# Altium PCB LPF.PcbDoc
Units mm, origin at the board's own origin, x right, y up, seen from the top; angles counter-clockwise.
Board outline 168 x 90 mm, 2 copper layers (Top Layer, Bottom Layer), stack 1.571 mm thick; 152 components, 40 nets, 384 pads, 857 vias.
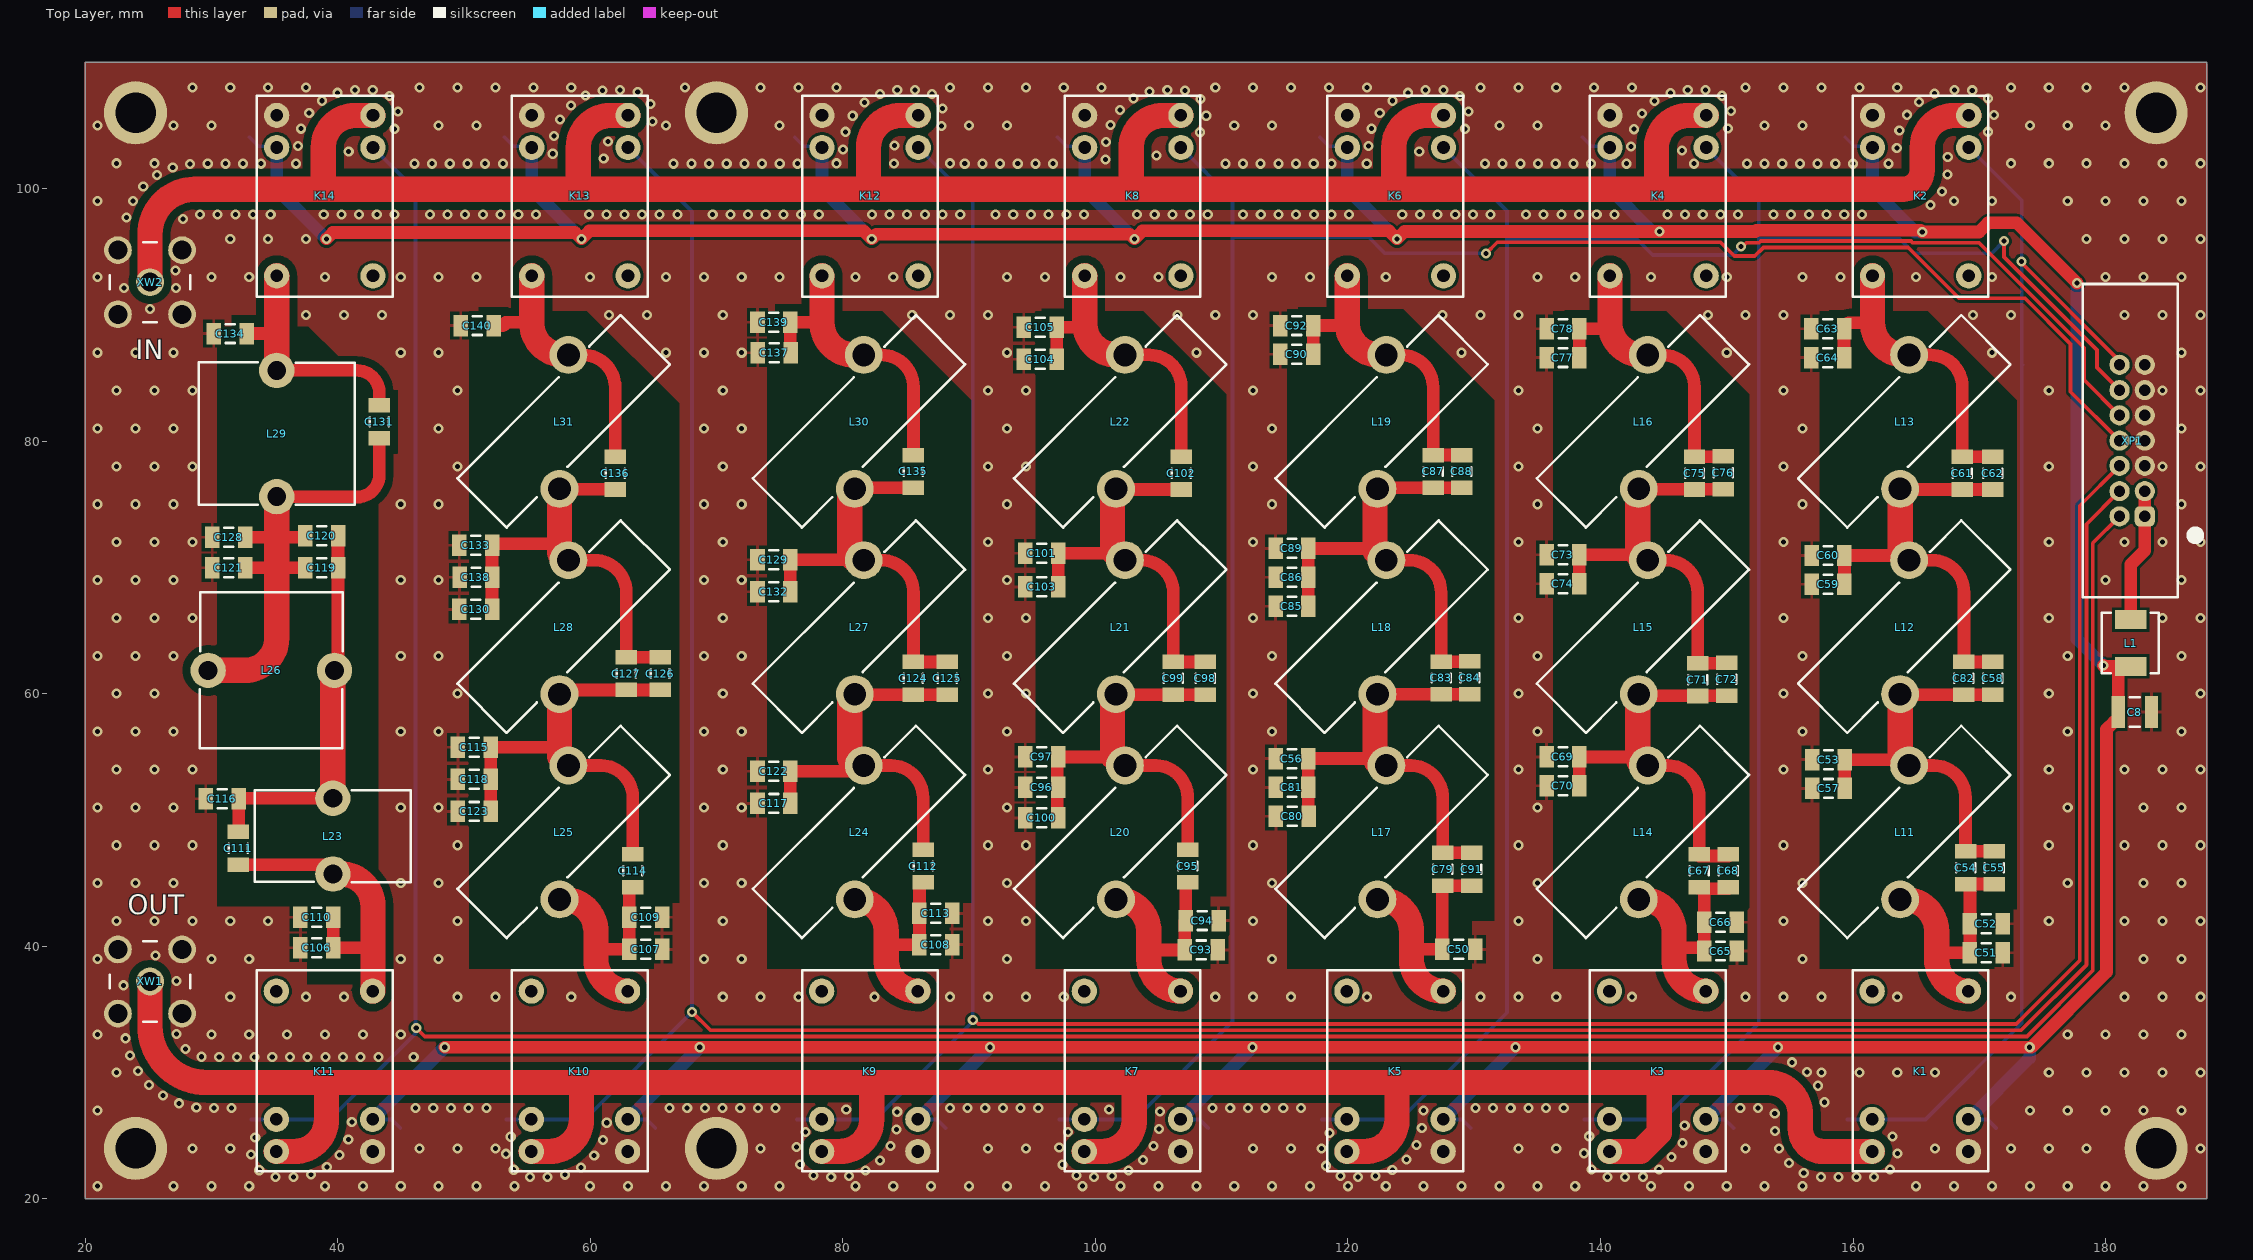
[diagram p0: Top Layer view]
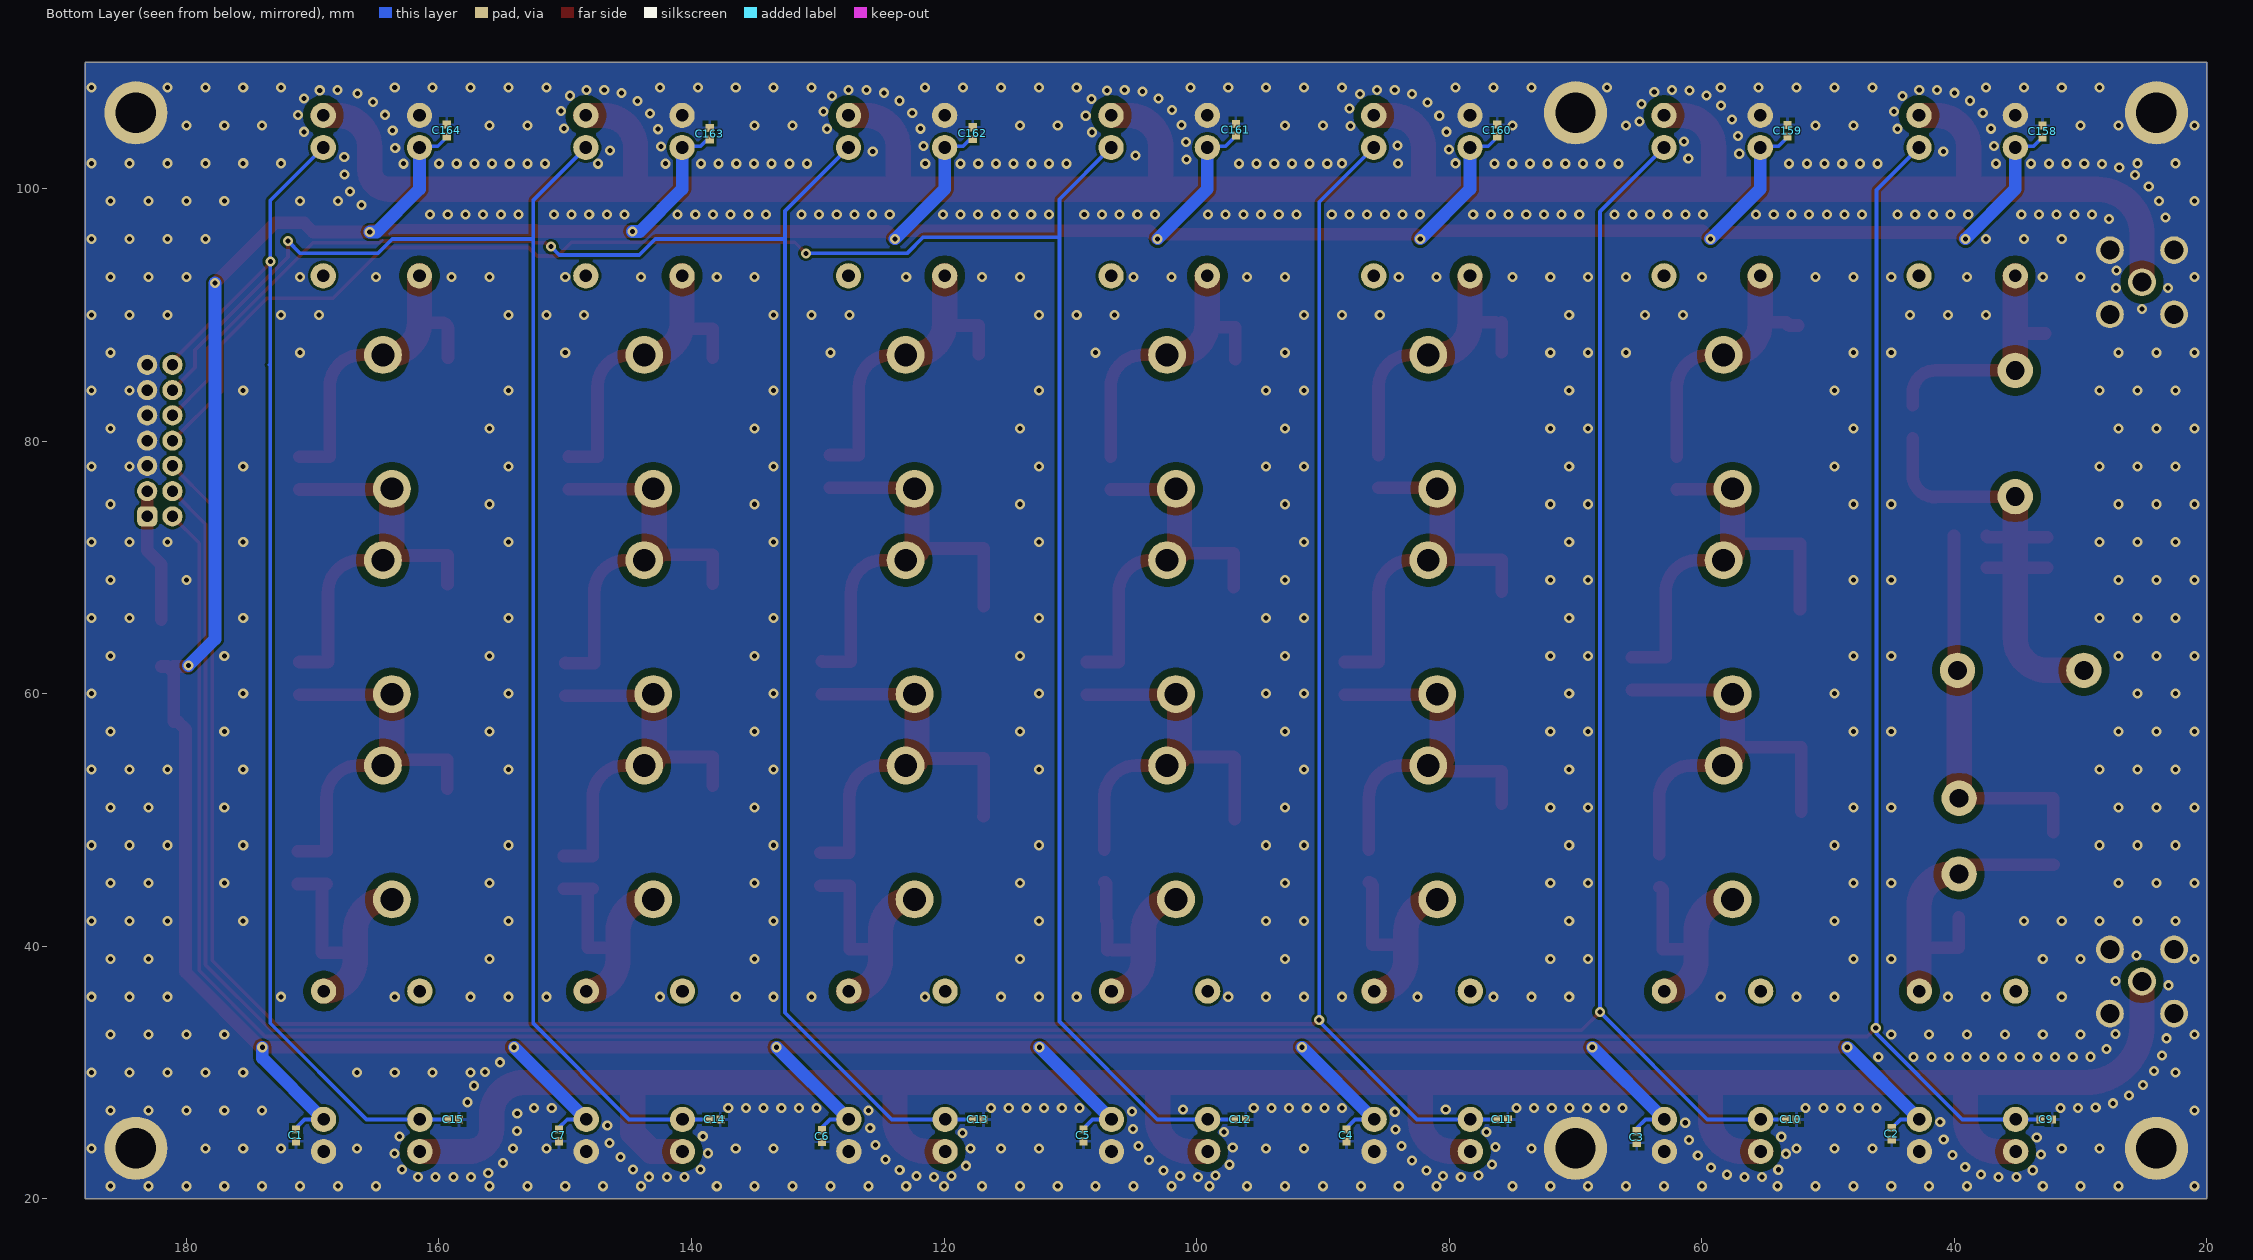
[diagram p1: Bottom Layer view, seen from below]
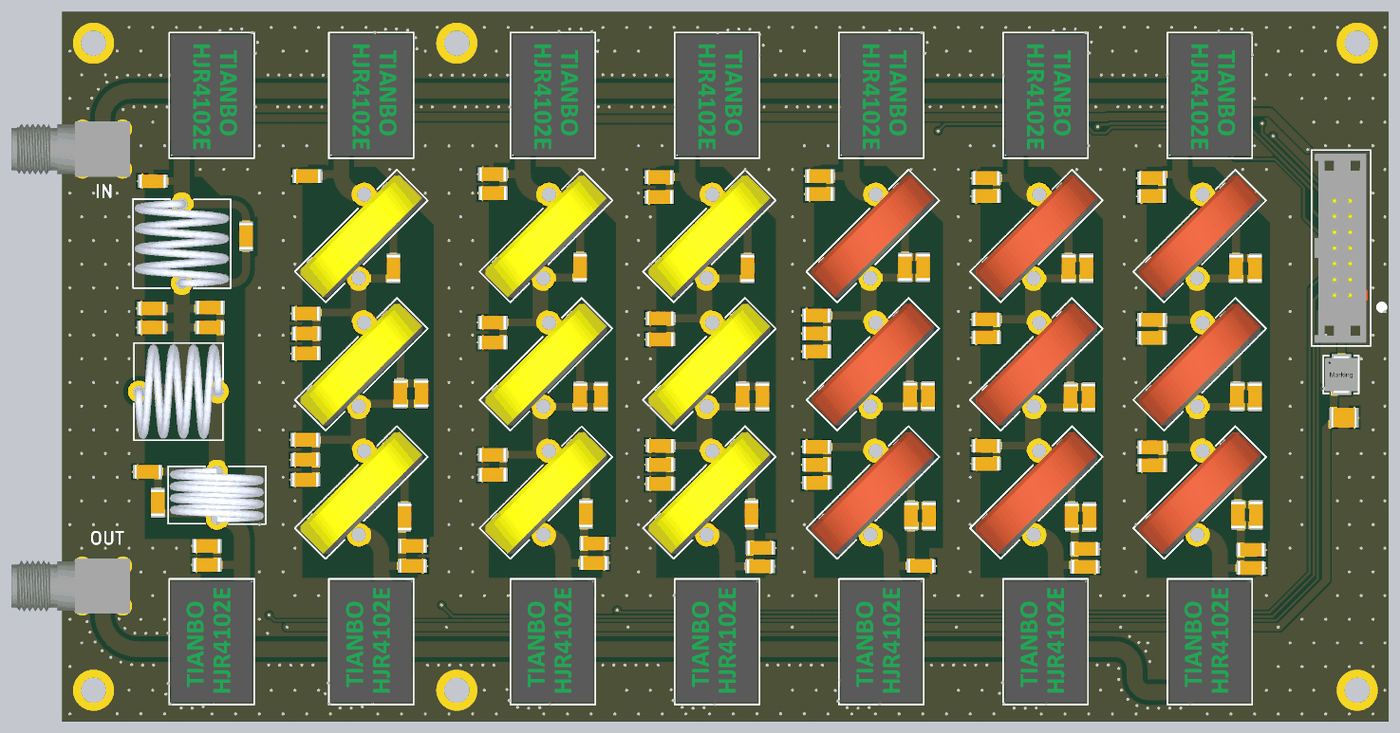
[diagram p2: 3D render of the assembled board from above, using the file's embedded part models]
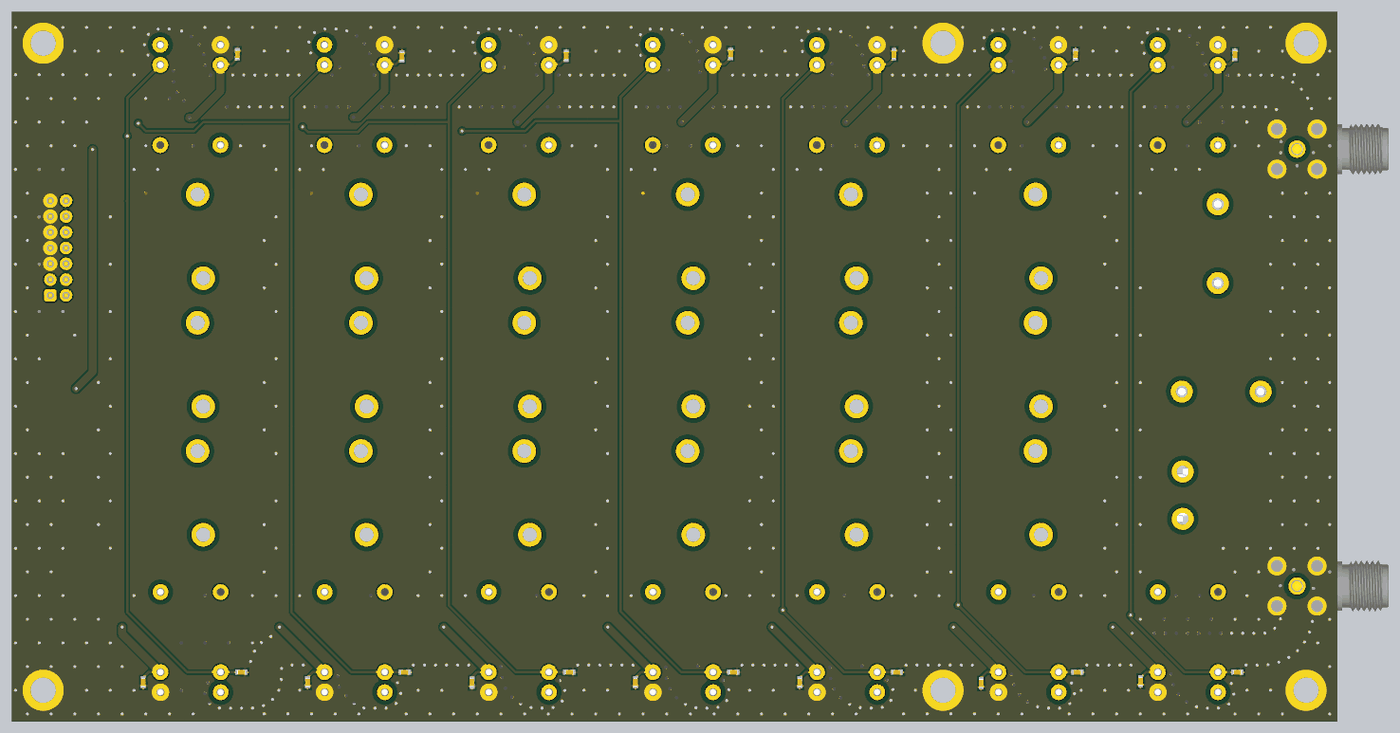
[diagram p3: 3D render of the assembled board from below, using the file's embedded part models]

## Layer stack, top to bottom
Top Solder: solder mask 0.0102, Solder Resist, Dk 3.5
Top Layer: signal copper 0.0356
Dielectric 1: dielectric 1.5, FR-4, Dk 4.8
Bottom Layer: signal copper 0.0356
Bottom Solder: solder mask 0.0102, Solder Resist, Dk 3.5

## Board outline
20,20 188,20 188,110 20,110

## Design rules (kind name [scope] priority, off if disabled: settings)
Clearance Clearance_1 [InNetClass('RF CLR')] p1: gap=0.4 ignorepadtopadclearanceinfootprint=FALSE except(0.6: Arc-Fill Arc-Poly Arc-Region Track-Fill Track-Poly Track-Region SMDPad-Fill SMDPad-Poly SMDPad-Region THPad-Fill THPad-Poly THPad-Region Via-Fill Via-Poly Via-Region Fill-Fill Fill-Poly Fill-Region Poly-Poly Poly-Region Region-Region)
Clearance [All] p2: gap=0.2 ignorepadtopadclearanceinfootprint=FALSE
HoleSize [All] p1: absolutevalues=TRUE maxlimit=5 minlimit=0.2 maxpercent=80.000 minpercent=20.000
PlaneConnect [All] p1: pad.planeconnectstyle=Relief pad.reliefexpansion=0.508 pad.reliefentries=4 pad.reliefconductorwidth=0.254 pad.reliefairgap=0.254 via.planeconnectstyle=Direct via.reliefexpansion=0.508 via.reliefentries=4 via.reliefconductorwidth=0.254 via.reliefairgap=0.254
PolygonConnect [All] p1: thpad.connectstyle=Direct thpad.reliefconductorwidth=0.254 thpad.reliefentries=4 thpad.polygonreliefangle="90 Angle" thpad.airgapwidth=0.254 smdpad.connectstyle=Relief smdpad.reliefconductorwidth=0.254 smdpad.reliefentries=4 smdpad.polygonreliefangle="90 Angle" smdpad.airgapwidth=0.254 via.connectstyle=Direct via.reliefconductorwidth=0.254 via.reliefentries=4 via.polygonreliefangle="90 Angle" via.airgapwidth=0.254
RoutingVias [All] p1: holewidth=0.4 width=0.8 viastyle="Through Hole" minholewidth=0.3 minwidth=0.7 maxholewidth=3.5 maxwidth=6
SolderMaskExpansion [All] p1: expansion=0.102 istentingtop=FALSE
SupplyNets "Schematic Supply Nets_59" [InNet('RELAY3')] p1: voltage=0.000
SupplyNets "Schematic Supply Nets_58" [InNet('RELAY5')] p2: voltage=0.000
SupplyNets "Schematic Supply Nets_57" [InNet('RELAY2')] p3: voltage=0.000
SupplyNets "Schematic Supply Nets_56" [InNet('RELAY1')] p4: voltage=0.000
SupplyNets "Schematic Supply Nets_55" [InNet('RELAY6')] p5: voltage=0.000
SupplyNets "Schematic Supply Nets_48" [InNet('RELAY0')] p6: voltage=0.000
SupplyNets "Schematic Supply Nets_47" [InNet('RELAY4')] p7: voltage=0.000
SupplyNets "Schematic Supply Nets_43" [InNet('VDD_12V')] p8: voltage=0.000
SupplyNets "Schematic Supply Nets_32" [InNet('GND')] p9: voltage=0.000
Width [All] p1: maxlimit=10 minlimit=0.2 preferedwidth=0.3
28 further rules are at their usual default settings.

## Classes and differential pairs
net class "RF CLR": NetC50_1 NetC51_1 NetC53_1 NetC56_1 NetC58_1 NetC61_1 NetC65_1 NetC67_1 NetC71_2 NetC75_1 NetC83_1 NetC87_1 NetC93_1 NetC95_1 NetC98_1 NetC102_1 NetC106_1 NetC107_1 NetC108_1 NetC111_1 NetC112_1 NetC114_1 NetC119_1 NetC124_1 NetC126_1 NetC131_1 NetC135_1 NetC136_1 NetK1_6 NetK2_6

## Components (designator, comment, footprint, x,y, rotation, side; value= is the part's Value field where it differs from the comment)
C1 "0.01мк" CAPC1005X06N 171.323,25.019 r90 bottom
C2 "0.01мк" CAPC1005X06N 44.958,25.146 r90 bottom
C3 "0.01мк" CAPC1005X06N 65.151,24.892 r90 bottom
C4 "0.01мк" CAPC1005X06N 88.138,25.019 r90 bottom
C5 "0.01мк" CAPC1005X06N 108.966,25.019 r90 bottom
C6 "0.01мк" CAPC1005X06N 129.667,24.971 r90 bottom
C7 "0.01мк" CAPC1005X06N 150.495,25.019 r90 bottom
C8 "10мк" CAPC3225X27L 182.317,58.547 r180 top
C9 "0.01мк" CAPC1005X06N 32.718,26.289 r0 bottom
C10 "0.01мк" CAPC1005X06N 52.959,26.289 r0 bottom
C11 "0.01мк" CAPC1005X06N 75.819,26.289 r0 bottom
C12 "0.01мк" CAPC1005X06N 96.568,26.289 r0 bottom
C13 "0.01мк" CAPC1005X06N 117.348,26.289 r0 bottom
C14 "0.01мк" CAPC1005X06N 138.176,26.289 r0 bottom
C15 "0.01мк" CAPC1005X06N 158.877,26.289 r0 bottom
C50 "470" CAPC3216X19L 128.778,39.751 r0 top
C51 "1000" CAPC3216X19L 170.561,39.497 r0 top
C52 "470" CAPC3216X19L 170.561,41.783 r0 top
C53 "2200" CAPC3216X19L 158.057,54.782 r180 top
C54 "100" CAPC3216X19L 168.91,46.228 r270 top
C55 "22" CAPC3216X19L 171.196,46.228 r270 top
C56 "220" CAPC3216X19L 115.57,54.864 r180 top
C57 "220" CAPC3216X19L 158.057,52.496 r180 top
C58 "470" CAPC3216X19L 171.069,61.214 r270 top
C59 "220" CAPC3216X19L 158.02,68.657 r180 top
C60 "2200" CAPC3216X19L 158.02,70.943 r180 top
C61 "220" CAPC3216X19L 168.656,77.47 r270 top
C62 "220" CAPC3216X19L 171.069,77.47 r270 top
C63 "1000" CAPC3216X19L 157.988,88.9 r180 top
C64 "220" CAPC3216X19L 157.988,86.614 r180 top
C65 "470" CAPC3216X19L 149.509,39.624 r0 top
C66 "470" CAPC3216X19L 149.509,41.91 r0 top
C67 "27" CAPC3216X19L 147.828,45.974 r270 top
C68 "22" CAPC3216X19L 150.114,45.974 r270 top
C69 "1000" CAPC3216X19L 137.033,54.991 r180 top
C70 "470" CAPC3216X19L 137.033,52.705 r180 top
C71 "220" CAPC3216X19L 147.701,61.117 r90 top
C72 "10" CAPC3216X19L 149.987,61.142 r270 top
C73 "1000" CAPC3216X19L 137.033,70.993 r180 top
C74 "470" CAPC3216X19L 137.033,68.707 r180 top
C75 "100" CAPC3216X19L 147.447,77.47 r270 top
C76 "47" CAPC3216X19L 149.733,77.5 r270 top
C77 "470" CAPC3216X19L 137.033,86.619 r180 top
C78 "470" CAPC3216X19L 137.033,88.905 r180 top
C79 "10" CAPC3216X19L 127.508,46.101 r270 top
C80 "220" CAPC3216X19L 115.6,50.292 r180 top
C81 "470" CAPC3216X19L 115.57,52.578 r180 top
C82 "100" CAPC3216X19L 168.783,61.214 r270 top
C83 "47" CAPC3216X19L 127.381,61.244 r270 top
C84 "47" CAPC3216X19L 129.667,61.269 r270 top
C85 "470" CAPC3216X19L 115.57,66.929 r180 top
C86 "220" CAPC3216X19L 115.57,69.215 r180 top
C87 "47" CAPC3216X19L 126.746,77.597 r270 top
C88 "10" CAPC3216X19L 129.032,77.597 r270 top
C89 "100" CAPC3216X19L 115.57,71.501 r180 top
C90 "220" CAPC3216X19L 115.951,86.868 r180 top
C91 "10" CAPC3216X19L 129.794,46.101 r270 top
C92 "220" CAPC3216X19L 115.951,89.154 r180 top
C93 "100" CAPC3216X19L 108.386,39.706 r0 top
C94 "100" CAPC3216X19L 108.458,42.037 r0 top
C95 "27" CAPC3216X19L 107.315,46.355 r270 top
C96 "220" CAPC3216X19L 95.758,52.578 r180 top
C97 "100" CAPC3216X19L 95.758,54.991 r180 top
C98 "27" CAPC3216X19L 108.712,61.214 r270 top
C99 "100" CAPC3216X19L 106.172,61.214 r270 top
C100 "47" CAPC3216X19L 95.758,50.165 r180 top
C101 "220" CAPC3216X19L 95.758,71.12 r180 top
C102 "100" CAPC3216X19L 106.807,77.47 r270 top
C103 "100" CAPC3216X19L 95.758,68.453 r180 top
C104 "100" CAPC3216X19L 95.631,86.487 r180 top
C105 "100" CAPC3216X19L 95.631,89.027 r180 top
C106 "22" CAPC3216X19L 38.354,39.878 r180 top
C107 "100" CAPC3216X19L 64.389,39.751 r0 top
C108 "100" CAPC3216X19L 87.376,40.132 r0 top
C109 "22" CAPC3216X19L 64.389,42.291 r0 top
C110 "47" CAPC3216X19L 38.354,42.291 r180 top
C111 "10" CAPC3216X19L 32.131,47.752 r270 top
C112 "10" CAPC3216X19L 86.36,46.355 r270 top
C113 "47" CAPC3216X19L 87.376,42.6 r0 top
C114 "10" CAPC3216X19L 63.373,45.974 r270 top
C115 "100" CAPC3216X19L 50.83,55.753 r180 top
C116 "100" CAPC3216X19L 30.861,51.689 r180 top
C117 "220" CAPC3216X19L 74.549,51.308 r180 top
C118 "27" CAPC3216X19L 50.83,53.213 r180 top
C119 "10" CAPC3216X19L 38.735,69.977 r0 top
C120 "27" CAPC3216X19L 38.735,72.517 r0 top
C121 "47" CAPC3216X19L 31.369,69.977 r180 top
C122 "47" CAPC3216X19L 74.549,53.848 r180 top
C123 "47" CAPC3216X19L 50.83,50.673 r180 top
C124 "27" CAPC3216X19L 85.598,61.214 r270 top
C125 "10" CAPC3216X19L 88.265,61.214 r270 top
C126 "10" CAPC3216X19L 65.532,61.595 r270 top
C127 "27" CAPC3216X19L 62.865,61.595 r270 top
C128 "47" CAPC3216X19L 31.369,72.39 r180 top
C129 "220" CAPC3216X19L 74.549,70.612 r180 top
C130 "100" CAPC3216X19L 50.927,66.675 r180 top
C131 "27" CAPC3216X19L 43.307,81.534 r270 top
C132 "47" CAPC3216X19L 74.549,68.072 r180 top
C133 "27" CAPC3216X19L 50.927,71.755 r180 top
C134 "47" CAPC3216X19L 31.496,88.519 r180 top
C135 "27" CAPC3216X19L 85.598,77.597 r270 top
C136 "27" CAPC3216X19L 61.976,77.47 r270 top
C137 "100" CAPC3216X19L 74.579,86.995 r180 top
C138 "47" CAPC3216X19L 50.957,69.215 r180 top
C139 "47" CAPC3216X19L 74.549,89.408 r180 top
C140 "100" CAPC3216X19L 51.054,89.154 r180 top
C158 "0.01мк" CAPC1005X06N 33.02,104.521 r270 bottom
C159 "0.01мк" CAPC1005X06N 53.213,104.569 r270 bottom
C160 "0.01мк" CAPC1005X06N 76.2,104.6 r270 bottom
C161 "0.01мк" CAPC1005X06N 96.901,104.648 r270 bottom
C162 "0.01мк" CAPC1005X06N 117.729,104.394 r270 bottom
C163 "0.01мк" CAPC1005X06N 138.557,104.346 r270 bottom
C164 "0.01мк" CAPC1005X06N 159.385,104.6 r270 bottom
K1 "HJR4102-L-12VDC-S-Z" HJR4102 161.514,26.289 r270 top
K2 "HJR4102-L-12VDC-S-Z" HJR4102 169.164,103.251 r90 top
K3 "HJR4102-L-12VDC-S-Z" HJR4102 140.718,26.289 r270 top
K4 "HJR4102-L-12VDC-S-Z" HJR4102 148.368,103.251 r90 top
K5 "HJR4102-L-12VDC-S-Z" HJR4102 119.922,26.289 r270 top
K6 "HJR4102-L-12VDC-S-Z" HJR4102 127.572,103.251 r90 top
K7 "HJR4102-L-12VDC-S-Z" HJR4102 99.125,26.289 r270 top
K8 "HJR4102-L-12VDC-S-Z" HJR4102 106.775,103.251 r90 top
K9 "HJR4102-L-12VDC-S-Z" HJR4102 78.329,26.289 r270 top
K10 "HJR4102-L-12VDC-S-Z" HJR4102 55.342,26.289 r270 top
K11 "HJR4102-L-12VDC-S-Z" HJR4102 35.149,26.289 r270 top
K12 "HJR4102-L-12VDC-S-Z" HJR4102 85.979,103.251 r90 top
K13 "HJR4102-L-12VDC-S-Z" HJR4102 62.992,103.251 r90 top
K14 "HJR4102-L-12VDC-S-Z" HJR4102 42.799,103.251 r90 top
L1 "2,2мкГн" CSAB0420 181.991,64.008 r270 top
L11 "4.79 мкГн" T68-2 165.849,47.244 r225 top
L12 "3.85 мкГн" T68-2 165.849,63.5 r225 top
L13 "3.85 мкГн" T68-2 165.849,79.756 r225 top
L14 "2.51 мкГн" T68-2 145.155,47.244 r225 top
L15 "2.28 мкГн" T68-2 145.155,63.5 r225 top
L16 "2.28 мкГн" T68-2 145.155,79.756 r225 top
L17 "1.48 мкГн" T68-2 124.462,47.244 r225 top
L18 "1.28 мкГн" T68-2 124.462,63.5 r225 top
L19 "1.28 мкГн" T68-2 124.462,79.756 r225 top
L20 "676 нГн" T68-6 103.76,47.244 r225 top
L21 "470 нГн" T68-6 103.76,63.5 r225 top
L22 "470 нГн" T68-6 103.76,79.756 r225 top
L23 "177 нГн" "COIL D11 W4 L6" 39.624,45.72 r90 top
L24 "470 нГн" T68-6 83.075,47.244 r225 top
L25 "381 нГн" T68-6 59.69,47.244 r225 top
L26 "130 нГн" "COIL D11 W4 L10" 39.751,61.849 r180 top
L27 "470 нГн" T68-6 83.075,63.5 r225 top
L28 "300 нГн" T68-6 59.69,63.5 r225 top
L29 "130 нГн" "COIL D11 W4 L10" 35.179,75.598 r90 top
L30 "381 нГн" T68-6 83.075,79.756 r225 top
L31 "300 нГн" T68-6 59.69,79.756 r225 top
XP1 "IDC2-14MS" IDC2-14MS 183.102,74.041 r180 top
XW1 "SMA-JR" SMA-JR 25.146,37.211 r270 top
XW2 "SMA-JR" SMA-JR 25.146,92.583 r270 top

## Footprints (in the part's own frame and the unit in brackets; to place one, negate y for a bottom-side part, rotate by r counter-clockwise, add the part's x,y. Pads: shape width x height; smd on the part's side, far side on the other; paste and mask are expansions set on the pad)
CAPC1005X06N [mm] "Chip Capacitor, 2-Leads, Body 1,00x0,50mm, IPC Medium Density"
  rect 0.64x0.64 smd mask+0.05: 1(-0.46,0) 2(0.46,0)
  body extent -0.55,-0.3 0.55,0.3, height 0.6
CAPC3216X19L [mm] "Chip Capacitor, 2-Leads, Body 3,20x1,60mm, IPC High Density"
  rect 1.15x1.7 smd: 1(-1.3,0) 2(1.3,0)
  silkscreen extent -0.35,-0.75 0.35,0.75, body extent -1.68,-0.87 1.68,0.87, height 1.9
CAPC3225X27L [mm] "Chip Capacitor, 2-Leads, Body 3,20x2,50mm, IPC High Density"
  rect 1.05x2.55 smd: 1(-1.325,0) 2(1.325,0)
  silkscreen extent -0.4,-1.17 0.4,1.18, body extent -1.6,-1.25 1.6,1.25, height 2.7
"COIL D11 W4 L6" [mm]
  round 2.8 hole 1.5: 1(0,0) 2(6,0)
  silkscreen extent -0.65,-6.17 6.65,6.17, body extent -0.5,-6 6.5,6, height 14
"COIL D11 W4 L10" [mm]
  round 2.8 hole 1.5: 1(0,0) 2(10,0)
  silkscreen extent -0.65,-6.17 10.65,6.17, body extent -0.5,-6 10.5,6, height 13.99
CSAB0420 [mm] "Wire Wound Inductor, 2-Leads,"
  rect 1.5x2.5 smd: 1(-1.85,0) 2(1.85,0)
  silkscreen extent -2.4,-2.3 2.4,2.2, body extent -2.35,-2.1 2.35,2.1, height 1.85
HJR4102 [mm]
  round 2 hole 1: 1(-10.16,0) 5(0,0) 6(2.54,0) 7(2.54,7.62) 8(0,7.62) 12(-10.16,7.62)
  silkscreen extent -11.83,-1.55 4.1,9.2, body extent -11.58,-1.37 3.92,9.03, height 11.7
IDC2-14MS [mm]
  rrect50% 1.6x1.6 hole 0.9: 1(0,0)
  round 1.6 hole 0.9: 2(2,0) 3(0,-2) 4(2,-2) 5(0,-4) 6(2,-4) 7(0,-6) 8(2,-6) 9(0,-8) 10(2,-8) 11(0,-10) 12(2,-10) 13(0,-12) 14(2,-12)
  silkscreen extent -4.2,-18.4 4.9,6.4, body extent -2.2,-17.98 4.51,5.98, height 5
SMA-JR [mm] "Connector; RF Coaxial, SMA, SM; 5 Position; Vertical - Large Pad Version"
  round 2.2 hole 1.5: 1(0,0) 2(-2.54,2.54) 2(-2.54,-2.54) 2(2.54,2.54) 2(2.54,-2.54)
  silkscreen extent -3.17,-3.17 3.17,3.17, body extent -3.5,-11.6 3.5,3.5, height 10.16
T68-2 [mm]
  round 3 hole 1.8: 1(4,1) 2(-4,-6)
  silkscreen extent -9.15,-5.3 9.13,0.21, body extent -8.9,-5.1 8.9,0, height 17.66
T68-6 [mm]
  round 3 hole 1.8: 1(4,1) 2(-4,-6)
  silkscreen extent -9.15,-5.3 9.12,0.21, body extent -8.9,-5.1 8.9,0, height 17.66

## Part data
C1 C2 C3 C4 C5 C6 C7 C9 C10 C11 C12 C13 C14 C15 C158 C159 C160 C161 C162 C163 C164: library part "Кер.ЧИП конд. 0402 0.01мкФ X7R 10%, 50В", "Кер. ЧИП-конденсатор", Power/Voltage=50В, Tolerance=±20%, TKE=X7R
C8: library part "Кер.ЧИП конд. 1210 10мкФ X5R 20% 50В", "Кер. ЧИП-конденсатор", Manufacturer=Murata, ManufacturerPartNumber=GRM32ER71H106, Power/Voltage=50В, Tolerance=±20%, TKE=X5R
C50 C52 C58 C65 C66 C70 C74 C77 C78 C81 C85: library part "Кер.ЧИП конд. 1206 470пФ NP0 10% 2000В", "Кер. ЧИП-конденсатор", Manufacturer=WALSIN, ManufacturerPartNumber=1206B471K202, Power/Voltage=2000В, Tolerance=±10%, TKE=NP0
C51 C63 C69 C73: library part "Кер.ЧИП конд. 1206 1000пФ X7К 10% 2000В", "Кер. ЧИП-конденсатор", Manufacturer=Johanson, ManufacturerPartNumber=202R18W102KV4E, Power/Voltage=2000В, Tolerance=±10%, TKE=X7R
C53 C60: library part "Кер.ЧИП конд. 1206 2200пФ X7К 10% 1000В", "Кер. ЧИП-конденсатор", Manufacturer=WALSIN, ManufacturerPartNumber=1206B222K102, Power/Voltage=1000В, Tolerance=±10%, TKE=X7R
C54 C75 C82 C89 C93 C94 C97 C99 C102 C103 C104 C105 C107 C108 C115 C116 C130 C137 C140: library part "Кер.ЧИП конд. 1206 100пФ NP0 5% 2000В", "Кер. ЧИП-конденсатор", Manufacturer=WALSIN, ManufacturerPartNumber=1206N101J202, Power/Voltage=2000В, Tolerance=±5%, TKE=NP0
C55 C68 C106 C109: library part "Кер.ЧИП конд. 1206 22пФ NP0 5% 2000В", "Кер. ЧИП-конденсатор", Manufacturer=WALSIN, ManufacturerPartNumber=1206N220J202, Power/Voltage=2000В, Tolerance=±5%, TKE=NP0
C56 C57 C59 C61 C62 C64 C71 C80 C86 C90 C92 C96 C101 C117 C129: library part "Кер.ЧИП конд. 1206 220пФ NP0 5% 2000В", "Кер. ЧИП-конденсатор", Manufacturer=Johanson, ManufacturerPartNumber=202R18W102KV4E, Power/Voltage=2000В, Tolerance=±10%, TKE=X7R
C67 C95 C98 C118 C120 C124 C127 C131 C133 C135 C136: library part "Кер.ЧИП конд. 1206 27пФ NP0 10% 2000В", "Кер. ЧИП-конденсатор", Manufacturer=WALSIN, ManufacturerPartNumber=1206N270J202, Power/Voltage=2000В, Tolerance=±10%, TKE=NP0
C72 C79 C88 C91 C111 C112 C114 C119 C125 C126: library part "Кер.ЧИП конд. 1206 10пФ NP0 5% 2000В", "Кер. ЧИП-конденсатор", Manufacturer=WALSIN, ManufacturerPartNumber=1206N100J202, Power/Voltage=2000В, Tolerance=±5%, TKE=NP0
C76 C83 C84 C87 C100 C110 C113 C121 C122 C123 C128 C132 C134 C138 C139: library part "Кер.ЧИП конд. 1206 47пФ NP0 5% 2000В", "Кер. ЧИП-конденсатор", Manufacturer=WALSIN, ManufacturerPartNumber=1206N470J202, Power/Voltage=2000В, Tolerance=±5%, TKE=NP0
K1 K2 K3 K4 K5 K6 K7 K8 K9 K10 K11 K12 K13 K14: library part "Реле HJR4102-L-12VDC-S-Z", "Реле 1пер. 12VDC, 1A/240VAC", ComponentLink1Description=datasheet, ComponentLink1URL=https://www.ti.com/lit/ds/symlink/tlvh431a.pdf?ts=1606914625003&ref_url=https%253A%252F%252Fwww.google.com%252F
L1: library part "ЧИП индуктивность CSAB0420-2R2M", "Molding Power Choke", Manufacturer=Vishay, ManufacturerPartNumber=IHLP1616ABER1R0M11
L11: library part "Индуктивность T68-2 4.79 мкГн", "29 витков"
L12 L13: library part "Индуктивность T68-2 3.85 мкГн", "26 витков"
L14: library part "Индуктивность T68-2 2.51 мкГн", "21 виток"
L15 L16: library part "Индуктивность T68-2 2.28 мкГн"
L17: library part "Индуктивность T68-2 1.48 мкГн", "16 витков"
L18 L19: library part "Индуктивность T68-2 1.28 мкГн", "16 витков"
L20: library part "Индуктивность T68-6 676 нГн", "12 витков"
L21 L22 L24 L27: library part "Индуктивность T68-6 470 нГн", "10 витков"
L23: library part "Индуктивность 177 нГн", "4 витка, диаметр 11мм, длина 6мм"
L25 L30: library part "Индуктивность T68-6 381 нГн", "9 витков"
L26 L29: library part "Индуктивность 130 нГн", "4 витка, диаметр 11мм, длина 10мм"
L28 L31: library part "Индуктивность T68-6 300 нГн", "8 витков"
XP1: library part "Соединитель IDC2-14MS", "JTAG Xilinx IDC2-14MS", Manufacturer=Molex
XW1 XW2: library part "Соединитель коаксиальный SMA-JR", "SMA-JR Разъем SMA гнездо на плату, прямой угол", ComponentLink1Description=datasheet, ComponentLink1URL=http://www.brownbear.ru/goods/2243.html

## Free pads (board coordinates)
  round 5 hole 3.2: 1(24,24) 1(24,106) 1(70,24) 1(70,106) 1(184,24) 1(184,106)

## Via types
v1: diameter 0.8, hole 0.4, Top Layer to Bottom Layer, tented both sides, 857 vias

## Nets (pads, with @x,y where several pads share a name; then routed paths per layer and width w, separated by ;. In a path a pad name is that pad's centre, name@x,y a point inside that pad or via, vN(x,y) a via of type N, cw(c..) or ccw(c..) an arc to the next point about the centre after c; other vN are vias at no path point)
GND: C1.1 C2.1 C3.1 C4.1 C5.1 C6.1 C7.1 C8.1 C9.1 C10.1 C11.1 C12.1 C13.1 C14.1 C15.1 C50.2 C51.2 C52.2 C53.2 C56.2 C57.2 C59.2 C60.2 C63.2 C64.2 C65.2 C66.2 C69.2 C70.2 C73.2 C74.2 C77.2 C78.2 C80.2 C81.2 C85.2 C86.2 C89.2 C90.2 C92.2 C93.2 C94.2 C96.2 C97.2 C100.2 C101.2 C103.2 C104.2 C105.2 C106.2 C107.2 C108.2 C109.2 C110.2 C113.2 C115.2 C116.2 C117.2 C118.2 C121.2 C122.2 C123.2 C128.2 C129.2 C130.2 C132.2 C133.2 C134.2 C137.2 C138.2 C139.2 C140.2 C158.1 C159.1 C160.1 C161.1 C162.1 C163.1 C164.1 K1.7 K2.7 K3.7 K4.7 K5.7 K6.7 K7.7 K8.7 K9.7 K10.7 K11.7 K12.7 K13.7 K14.7 pad.1 XP1.5 XP1.7 XP1.9 XP1.11 XP1.13 XW1.2 XW2.2
  other v1: 21,21 27,21 30,21 33,21 39,21 42,21 45,21 48,21 51,21 54,21 60,21 63,21 66,21 69,21 72,21 75,21 81,21 84,21 87,21 90,21 93,21 96,21 99,21 102,21 105,21 108,21 111,21 114,21 117,21 120,21 123,21 126,21 129,21 132,21 135,21 138,21 144,21 147,21 150,21 153,21 156,21 165,21 168,21 171,21 174,21 177,21 180,21 183,21 186,21 35.094,21.739 36.494,21.732 55.227,21.74 56.627,21.732 79.087,21.732 99.905,21.732 120.799,21.732 140.558,21.744 141.958,21.732 143.358,21.746 157.463,21.742 158.862,21.732 160.262,21.732 161.662,21.743 80.486,21.795 101.304,21.797 119.402,21.809 122.197,21.815 77.691,21.84 98.509,21.835 37.881,21.924 58.016,21.91 156.099,22.061 81.817,22.229 33.795,22.262 102.632,22.239 123.516,22.283 53.946,22.305 139.289,22.337 144.626,22.339 162.934,22.328 59.287,22.497 39.144,22.528 118.258,22.617 97.41,22.702 76.603,22.721 154.942,22.848 82.954,23.046 103.764,23.063 124.632,23.129 145.616,23.329 60.319,23.442 33.155,23.507 40.164,23.486 53.34,23.567 163.52,23.6 138.71,23.611 117.926,23.977 28.5,24 31.5,24 46.5,24 49.5,24 52.5,24 73.5,24 91.5,24 94.5,24 112.5,24 115.5,24 133.5,24 136.5,24 151.5,24 154.148,24.002 166.5,24 172.5,24 175.5,24 178.5,24 187.5,24 97.142,24.076 76.349,24.098 83.789,24.17 104.594,24.19 125.435,24.275 146.496,24.418 61.016,24.657 40.845,24.71 33.477,24.87 53.707,24.918 139.11,24.953 163.129,24.944 118.558,25.226 77.058,25.305 97.836,25.292 153.823,25.363 84.243,25.494 105.042,25.517 125.852,25.612 146.67,25.807 61.311,26.025 41.122,26.082 153.801,26.763 84.313,26.892 105.11,26.915 21,27 126,27 174,27 177,27 180,27 183,27 186,27 80.279,27.078 101.075,27.067 30.209,27.193 31.609,27.193 46.174,27.193 47.574,27.193 48.974,27.193 50.374,27.193 51.774,27.193 66.283,27.193 67.683,27.193 69.083,27.193 70.483,27.193 71.883,27.193 73.283,27.193 74.683,27.193 88.481,27.193 89.881,27.193 91.281,27.193 92.681,27.193 94.081,27.193 95.481,27.193 109.282,27.193 110.682,27.193 112.082,27.193 113.482,27.193 114.882,27.193 116.282,27.193 130.094,27.193 131.494,27.193 132.894,27.193 134.294,27.193 135.694,27.193 137.094,27.193 151.068,27.193 152.468,27.193 28.809,27.239 27.448,27.567 157.732,27.65 26.184,28.169 157.224,28.955 25.079,29.028 22.5,30 157.5,30 160.5,30 163.5,30 166.5,30 175.5,30 178.5,30 181.5,30 184.5,30 187.5,30 156.343,30.043 24.195,30.114 155.174,30.813 30.626,31.227 32.026,31.227 33.426,31.227 34.826,31.227 36.226,31.227 37.626,31.227 39.026,31.227 40.426,31.227 41.826,31.227 43.226,31.227 46.026,31.227 29.226,31.253 23.555,31.359 27.964,31.858 23.198,32.713 21,33 30,33 33,33 36,33 39,33 42,33 45,33 177,33 180,33 183,33 186,33 27.242,33.057 31.5,36 37.5,36 40.5,36 49.5,36 52.5,36 58.5,36 70.5,36 73.5,36 76.5,36 82.5,36 88.5,36 91.5,36 94.5,36 97.5,36 109.5,36 112.5,36 115.5,36 121.5,36 130.5,36 133.5,36 136.5,36 142.5,36 151.5,36 154.5,36 157.5,36 163.5,36 172.5,36 181.5,36 184.5,36 187.5,36 23.059,36.91 27.255,37.252 21,39 30,39 33,39 45,39 48,39 69,39 72,39 93,39 114,39 135,39 156,39 183,39 186,39 25.565,39.283 22.5,42 25.5,42 28.5,42 31.5,42 34.5,42 49.5,42 70.5,42 91.5,42 94.5,42 112.5,42 133.5,42 154.5,42 175.5,42 181.5,42 184.5,42 187.5,42 21,45 24,45 27,45 45,45 48,45 69,45 72,45 93,45 114,45 135,45 156,45 177,45 183,45 186,45 22.5,48 25.5,48 28.5,48 49.5,48 70.5,48 91.5,48 94.5,48 112.5,48 133.5,48 154.5,48 175.5,48 181.5,48 184.5,48 187.5,48 21,51 24,51 27,51 45,51 48,51 69,51 72,51 93,51 135,51 177,51 183,51 186,51 22.5,54 25.5,54 28.5,54 70.5,54 91.5,54 112.5,54 133.5,54 154.5,54 175.5,54 181.5,54 184.5,54 187.5,54 21,57 24,57 27,57 45,57 48,57 69,57 72,57 93,57 114,57 135,57 156,57 177,57 186,57 22.5,60 25.5,60 49.5,60 70.5,60 91.5,60 94.5,60 112.5,60 133.5,60 154.5,60 175.5,60 187.5,60 21,63 24,63 27,63 45,63 48,63 69,63 72,63 93,63 114,63 135,63 156,63 177,63 186,63 22.5,66 25.5,66 28.5,66 70.5,66 91.5,66 94.5,66 112.5,66 133.5,66 154.5,66 175.5,66 184.5,66 187.5,66 21,69 24,69 27,69 45,69 48,69 69,69 72,69 93,69 180,69 186,69 22.5,72 25.5,72 28.5,72 70.5,72 91.5,72 112.5,72 133.5,72 154.5,72 175.5,72 181.5,72 184.5,72 187.5,72 21,75 24,75 27,75 45,75 48,75 69,75 72,75 93,75 114,75 135,75 156,75 186,75 22.5,78 25.5,78 28.5,78 49.5,78 70.5,78 91.5,78 94.5,78 112.5,78 133.5,78 154.5,78 175.5,78 184.5,78 187.5,78 21,81 24,81 27,81 48,81 69,81 72,81 93,81 114,81 135,81 156,81 186,81 22.5,84 25.5,84 28.5,84 49.5,84 70.5,84 91.5,84 94.5,84 112.5,84 133.5,84 154.5,84 175.5,84 184.5,84 187.5,84 21,87 24,87 27,87 45,87 48,87 66,87 69,87 72,87 93,87 108,87 129,87 150,87 171,87 186,87 37.5,90 40.5,90 43.5,90 61.5,90 64.5,90 70.5,90 85.5,90 88.5,90 91.5,90 106.5,90 109.5,90 112.5,90 127.5,90 130.5,90 133.5,90 148.5,90 151.5,90 154.5,90 169.5,90 172.5,90 181.5,90 184.5,90 187.5,90 25.138,90.474 23.083,92.133 27.206,92.119 21,93 30,93 33,93 39,93 45,93 48,93 51,93 60,93 66,93 69,93 72,93 75,93 81,93 84,93 93,93 96,93 102,93 105,93 114,93 117,93 123,93 135,93 138,93 144,93 150,93 156,93 159,93 165,93 171,93 180,93 183,93 186,93 27.163,93.519 31.5,96 34.5,96 37.5,96 178.5,96 181.5,96 184.5,96 187.5,96 27.744,97.592 23.293,97.723 29.102,97.932 30.502,97.932 31.902,97.932 33.302,97.932 34.702,97.932 38.902,97.932 40.302,97.932 41.702,97.932 43.102,97.932 44.502,97.932 47.302,97.932 48.702,97.932 50.102,97.932 51.502,97.932 52.902,97.932 54.302,97.932 55.702,97.932 59.902,97.932 61.302,97.932 62.702,97.932 64.102,97.932 65.502,97.932 66.902,97.932 69.702,97.932 71.102,97.932 72.502,97.932 73.902,97.932 75.302,97.932 76.702,97.932 78.102,97.932 82.302,97.932 83.702,97.932 85.102,97.932 86.502,97.932 87.902,97.932 89.302,97.932 92.102,97.932 93.502,97.932 94.902,97.932 96.302,97.932 97.702,97.932 99.102,97.932 103.302,97.932 104.702,97.932 106.102,97.932 107.502,97.932 108.902,97.932 111.702,97.932 113.102,97.932 114.502,97.932 115.902,97.932 117.302,97.932 118.702,97.932 120.102,97.932 124.302,97.932 125.702,97.932 127.102,97.932 128.502,97.932 129.902,97.932 131.302,97.932 134.102,97.932 135.502,97.932 136.902,97.932 138.302,97.932 139.702,97.932 141.102,97.932 145.302,97.932 146.702,97.932 148.102,97.932 149.502,97.932 150.902,97.932 153.702,97.932 155.102,97.932 156.502,97.932 157.902,97.932 159.302,97.932 160.702,97.932 166.145,98.699 21,99 168,99 171,99 177,99 180,99 183,99 186,99 23.797,99.029 167.05,99.766 24.611,100.168 25.683,101.068 167.47,101.102 26.946,101.673 28.319,101.944 29.719,101.966 31.119,101.966 32.519,101.966 33.919,101.966 36.719,101.966 46.083,101.966 47.483,101.966 48.883,101.966 50.283,101.966 51.683,101.966 53.083,101.966 66.612,101.966 68.012,101.966 69.412,101.966 70.812,101.966 72.212,101.966 73.612,101.966 75.012,101.966 76.412,101.966 89.659,101.966 91.059,101.966 92.459,101.966 93.859,101.966 95.259,101.966 96.659,101.966 110.294,101.966 111.694,101.966 113.094,101.966 114.494,101.966 115.894,101.966 117.294,101.966 118.694,101.966 121.494,101.966 130.856,101.966 132.256,101.966 133.656,101.966 135.056,101.966 136.456,101.966 137.856,101.966 139.256,101.966 142.056,101.966 147.394,101.966 151.594,101.966 152.994,101.966 154.394,101.966 155.794,101.966 157.194,101.966 158.594,101.966 159.994,101.966 162.794,101.966 22.5,102 25.5,102 79.5,102 84.059,101.994 88.5,102 172.5,102 175.5,102 178.5,102 181.5,102 184.5,102 187.5,102 100.821,102.29 61.072,102.372 167.498,102.502 104.856,102.618 57.038,102.757 40.879,102.943 125.652,102.942 146.448,102.998 80.025,103.106 163.464,103.196 142.415,103.319 36.848,103.36 121.62,103.361 84.083,103.394 100.85,103.69 61.399,103.733 57.134,104.154 108.282,104.457 80.203,104.495 170.702,104.496 163.663,104.581 142.652,104.699 44.507,104.733 129.28,104.732 37.095,104.738 121.867,104.739 150.096,104.767 87.807,104.955 21,105 27,105 30,105 48,105 51,105 66,105 75,105 90,105 93,105 111,105 114,105 132,105 135,105 153,105 156,105 174,105 177,105 180,105 101.198,105.046 64.94,105.3 57.619,105.468 80.789,105.766 108.784,105.764 171.173,105.814 164.273,105.841 143.297,105.942 37.751,105.975 122.523,105.975 44.784,106.105 129.556,106.105 150.347,106.144 101.942,106.232 87.908,106.352 58.479,106.572 64.791,106.692 81.733,106.8 165.238,106.856 144.289,106.93 38.751,106.954 123.524,106.954 108.315,107.083 170.674,107.122 103.012,107.135 44.098,107.326 128.871,107.326 149.636,107.35 59.635,107.362 87.076,107.477 82.947,107.497 166.465,107.53 145.533,107.572 40.002,107.583 124.775,107.583 63.765,107.645 104.305,107.671 60.975,107.765 107.098,107.774 169.438,107.781 41.384,107.808 42.784,107.808 62.375,107.808 84.316,107.793 85.716,107.808 105.698,107.808 126.157,107.808 127.557,107.808 146.913,107.806 148.313,107.808 168.039,107.808 28.5,108 31.5,108 34.5,108 37.5,108 46.5,108 49.5,108 52.5,108 55.5,108 58.5,108 67.5,108 73.5,108 76.5,108 79.5,108 88.5,108 91.5,108 94.5,108 97.5,108 100.5,108 109.5,108 112.5,108 115.5,108 118.5,108 121.5,108 130.5,108 133.5,108 136.5,108 139.5,108 142.5,108 151.5,108 154.5,108 157.5,108 160.5,108 163.5,108 172.5,108 175.5,108 178.5,108 181.5,108 187.5,108
NetC50_1: C50.1 C79.2 C91.2 K5.12 L17.1 | length 20.4
  Top Layer w1: 125.031,38.959 cw(c125.823,38.959) 125.823,39.751 C50.1 127.478,44.771 cw(c127.508,44.771) C79.2 C91.2
  Top Layer w2: L17.1@122.492,43.708 cw(c122.492,41.168) 125.031,41.168 125.031,38.959 ccw(c127.542,38.959) K5.12
NetC51_1: C51.1 C52.1 C54.2 C55.2 K1.12 L11.1 | length 21
  Top Layer w1: 166.624,38.959 cw(c167.162,38.959) 167.162,39.497 C51.1 169.261,44.577 ccw(c168.91,44.577) C54.2 C55.2
  Top Layer w2: L11.1@164.084,43.708 cw(c164.084,41.168) 166.624,41.168 166.624,38.959 ccw(c169.134,38.959) K1.12
NetC53_1: C53.1 C54.1 C55.1 C57.1 C58.2 C82.2 L11.2 L12.1 | length 33.5
  Top Layer w1: C57.1 C53.1 163.968,54.782 cw(c163.968,54.315) L11.2 164.448,54.315 166.37,54.315 cw(c166.37,51.775) 168.91,51.775 C54.1 C55.1 ; L12.1 ccw(c163.778,59.964) 163.778,59.914 C82.2 C58.2
  Top Layer w2: L12.1@163.741,59.964 163.741,55.022 ccw(c164.448,55.022) L11.2@164.448,54.315
NetC56_1: C56.1 C79.1 C80.1 C81.1 C83.2 C84.2 C91.1 L17.2 L18.1 | length 36.2
  Top Layer w1: C80.1 cw(c116.9,50.322) 116.87,50.322 C81.1 C56.1 L17.2@122.499,54.864 ; L18.1 122.341,59.969 C84.2 ; L17.2 124.968,54.315 cw(c124.968,51.775) 127.508,51.775 C79.1 C91.1
  Top Layer w2: L18.1@122.148,59.964 122.148,55.022 ccw(c122.855,55.022) L17.2@122.855,54.315
NetC58_1: C58.1 C59.1 C60.1 C61.2 C62.2 C82.1 L12.2 L13.1 | length 34.6
  Top Layer w1: C59.1 C60.1 164.063,70.943 cw(c164.063,70.571) L12.2 166.243,70.571 cw(c166.243,68.031) 168.783,68.031 C82.1 C58.1 ; L13.1 ccw(c163.778,76.22) 163.778,76.17 C61.2 C62.2
  Top Layer w2: L13.1@163.741,76.22 163.741,71.278 ccw(c164.448,71.278) L12.2@164.448,70.571
NetC61_1: C61.1 C62.1 C63.1 C64.1 K2.12 L13.2 | length 26.1
  Top Layer w1: C64.1 C63.1 cw(c159.755,88.9) 159.755,89.367 161.544,89.367 ; L13.2 166.116,86.827 cw(c166.116,84.287) 168.656,84.287 C61.1 C62.1
  Top Layer w2: K2.12 161.544,89.367 ccw(c164.084,89.367) L13.2@164.084,86.827
NetC65_1: C65.1 C66.1 C67.2 C68.2 K3.12 L14.1 | length 20.2
  Top Layer w1: 145.828,38.959 cw(c146.747,38.959) 146.747,39.878 148.209,39.878 148.209,42.164 148.209,44.166 ccw(c147.828,44.166) 147.828,44.547 C68.2@150.114,44.547
  Top Layer w2: L14.1@143.288,43.708 cw(c143.288,41.168) 145.828,41.168 145.828,38.959 ccw(c148.338,38.959) K3.12
NetC67_1: C67.1 C68.1 C69.1 C70.1 C71.1 C72.2 L14.2 L15.1 | length 32.5
  Top Layer w1: C70.1 C69.1 L14.2@143.065,54.991 ; L15.1 ccw(c143.156,59.964) 143.156,59.842 C72.2 ; L14.2 145.288,54.315 cw(c145.288,51.775) 147.828,51.775 147.828,47.147 C68.1@150.114,47.147
  Top Layer w2: L15.1@142.944,59.964 142.944,55.022 ccw(c143.652,55.022) L14.2@143.652,54.315
NetC71_2: C71.2 C72.1 C73.1 C74.1 C75.2 C76.2 L15.2 L16.1 | length 33.4
  Top Layer w1: C74.1 C73.1 L15.2@143.319,70.993 ; L16.1 ccw(c143.055,76.22) 143.055,76.2 C76.2 ; L15.2 145.161,70.571 cw(c145.161,68.031) 147.701,68.031 C71.2 149.962,62.417 ccw(c149.962,62.442) C72.1
  Top Layer w2: L16.1@142.944,76.22 142.944,71.278 ccw(c143.652,71.278) L15.2@143.652,70.571
NetC75_1: C75.1 C76.1 C77.1 C78.1 K4.12 L16.2 | length 25.7
  Top Layer w1: C77.1 C78.1 140.286,88.905 ccw(c140.286,89.367) 140.748,89.367 ; L16.2 144.907,86.827 cw(c144.907,84.287) 147.447,84.287 C75.1 149.703,78.77 ccw(c149.703,78.8) C76.1
  Top Layer w2: K4.12 140.748,89.367 ccw(c143.288,89.367) L16.2@143.288,86.827
NetC83_1: C83.1 C84.1 C85.1 C86.1 C87.2 C88.2 C89.1 L18.2 L19.1 | length 35.2
  Top Layer w1: C85.1 C86.1 C89.1 121.925,71.501 cw(c121.925,71.278) L18.2@122.148,71.278 ; L19.1 cw(c122.417,76.22) 122.417,76.297 C87.2 C88.2 ; L18.2 124.841,70.571 cw(c124.841,68.031) 127.381,68.031 C83.1 129.642,62.544 ccw(c129.642,62.569) C84.1
  Top Layer w2: L18.2@122.148,71.278 L19.1@122.148,76.22
NetC87_1: C87.1 C88.1 C90.1 C92.1 K6.12 L19.2 | length 25.6
  Top Layer w1: C90.1 C92.1 119.738,89.154 ccw(c119.738,89.367) 119.951,89.367 ; L19.2 124.206,86.827 cw(c124.206,84.287) 126.746,84.287 C87.1 C88.1
  Top Layer w2: K6.12 119.951,89.367 ccw(c122.492,89.367) L19.2@122.492,86.827
NetC93_1: C93.1 C94.1 C95.2 K7.12 L20.1 | length 18.5
  Top Layer w1: 104.235,38.959 cw(c104.982,38.959) 104.982,39.706 C93.1@106.705,39.706 ; C93.1 107.089,39.709 107.089,41.968 C94.1 107.158,44.98 107.233,45.055 C95.2
  Top Layer w2: L20.1@101.695,43.708 cw(c101.695,41.168) 104.235,41.168 104.235,38.959 ccw(c106.745,38.959) K7.12
NetC95_1: C95.1 C96.1 C97.1 C98.2 C99.2 C100.1 L20.2 L21.1 | length 31.8
  Top Layer w1: C100.1@96.984,50.079 96.984,52.577 96.984,54.917 C97.1 101.321,54.991 ccw(c101.321,55.022) L20.2@101.352,55.022 ; L21.1 ccw(c101.689,59.964) 101.689,59.914 C98.2 ; L20.2 104.775,54.315 cw(c104.775,51.775) 107.315,51.775 C95.1
  Top Layer w2: L20.2@101.352,55.022 L21.1@101.352,59.964
NetC98_1: C98.1 C99.1 C101.1 C102.2 C103.1 L21.2 L22.1 | length 30.5
  Top Layer w1: C103.1 C101.1 101.194,71.12 ccw(c101.194,71.278) L21.2@101.352,71.278 ; L22.1 ccw(c101.689,76.22) 101.689,76.17 C102.2 ; L21.2 103.632,70.571 cw(c103.632,68.031) 106.172,68.031 C99.1 C98.1
  Top Layer w2: L21.2@101.352,71.278 L22.1@101.352,76.22
NetC102_1: C102.1 C104.1 C105.1 K8.12 L22.2 | length 24.1
  Top Layer w1: C104.1 C105.1 98.815,89.027 ccw(c98.815,89.367) 99.155,89.367 ; L22.2 104.267,86.827 cw(c104.267,84.287) 106.807,84.287 C102.1
  Top Layer w2: K8.12 99.155,89.367 ccw(c101.695,89.367) L22.2@101.695,86.827
NetC106_1: C106.1 C110.1 C111.2 K11.12 L23.1 | length 24.9
  Top Layer w1: C111.2 38.892,46.452 cw(c38.892,45.72) L23.1 ; C110.1 C106.1 42.751,39.878 cw(c42.751,39.83) 42.799,39.83
  Top Layer w2: L23.1 40.259,45.72 cw(c40.259,43.18) 42.799,43.18 42.799,39.83 42.799,36.479 cw(c42.769,36.479) K11.12
NetC107_1: C107.1 C109.1 C114.2 K10.12 L25.1 | length 18.7
  Top Layer w1: 60.452,38.959 cw(c61.244,38.959) 61.244,39.751 C107.1 63.089,44.39 cw(c63.373,44.39) C114.2
  Top Layer w2: L25.1 57.912,43.708 cw(c57.912,41.168) 60.452,41.168 60.452,38.959 ccw(c62.962,38.959) K10.12
NetC108_1: C108.1 C112.2 C113.1 K9.12 L24.1 | length 17.9
  Top Layer w1: 83.439,40.064 cw(c83.507,40.064) 83.507,40.132 C108.1 C113.1 86.076,44.771 cw(c86.36,44.771) C112.2
  Top Layer w2: L24.1@80.899,43.708 cw(c80.899,41.168) 83.439,41.168 83.439,40.064 83.439,38.959 ccw(c85.949,38.959) K9.12
NetC111_1: C111.1 C116.1 C119.2 C120.2 L23.2 L26.1 | length 31.1
  Top Layer w1: C111.1@32.161,49.052 C116.1 ; C116.1@32.161,51.72 L23.2 ; L26.1 ccw(c39.751,62.133) 40.035,62.133 C119.2 C120.2
  Top Layer w2: L23.2 39.624,61.722 cw(c39.751,61.722) L26.1
NetC112_1: C112.1 C117.1 C122.1 C124.2 C125.2 L24.2 L27.1 | length 32.3
  Top Layer w1: C117.1 C122.1 81.194,53.848 ccw(c81.194,54.315) L24.2 83.82,54.315 cw(c83.82,51.775) 86.36,51.775 C112.1 ; L27.1 ccw(c81.004,59.964) 81.004,59.914 C124.2 C125.2
  Top Layer w2: L27.1@80.556,59.964 80.556,55.022 ccw(c81.263,55.022) L24.2@81.263,54.315
NetC114_1: C114.1 C115.1 C118.1 C123.1 C126.2 C127.2 L25.2 L28.1 | length 35.1
  Top Layer w1: C123.1 C118.1 C115.1 56.838,55.753 cw(c56.838,55.022) L25.2@57.569,55.022 ; L28.1 cw(c57.899,59.964) 57.899,60.295 C127.2 C126.2 ; L25.2 60.833,54.315 cw(c60.833,51.775) 63.373,51.775 C114.1
  Top Layer w2: L25.2@57.569,55.022 L28.1
NetC119_1: C119.1 C120.1 C121.1 C128.1 C131.2 L26.2 L29.1 | length 39.7
  Top Layer w1: C121.1 35.179,69.977 C119.1 ; C128.1 35.179,72.39 37.308,72.39 ccw(c37.308,72.517) C120.1 ; L29.1 41.496,75.598 cw(c41.496,75.565) 41.529,75.565 ccw(c41.529,77.343) 43.307,77.343 C131.2
  Top Layer w2: L26.2 32.639,61.849 ccw(c32.639,64.389) 35.179,64.389 35.179,69.977 35.179,72.39 L29.1
NetC124_1: C124.1 C125.1 C129.1 C132.1 C135.2 L27.2 L30.1 | length 31.5
  Top Layer w1: C132.1 C129.1 ; C129.1@75.946,70.612 L27.2@80.556,70.612 ; L30.1 cw(c81.03,76.22) 81.03,76.297 C135.2 ; L27.2 83.058,70.571 cw(c83.058,68.031) 85.598,68.031 C124.1 C125.1
  Top Layer w2: L30.1@80.556,76.22 80.556,71.278 ccw(c81.263,71.278) L27.2@81.263,70.571
NetC126_1: C126.1 C127.1 C130.1 C133.1 C136.2 C138.1 L28.2 L31.1 | length 35
  Top Layer w1: C130.1 C133.1 ; C133.1@52.227,71.882 57.061,71.882 ccw(c57.061,72.39) 57.569,72.39 ; L31.1 57.594,76.195 61.951,76.195 C136.2 ; L28.2 60.325,70.571 cw(c60.325,68.031) 62.865,68.031 C127.1 C126.1
  Top Layer w2: L31.1 57.569,72.39 57.569,71.278 ccw(c58.276,71.278) L28.2
NetC131_1: C131.1 C134.1 K14.12 L29.2 | length 20.1
  Top Layer w1: C134.1 35.052,88.519 cw(c35.052,88.392) 35.179,88.392 ; L29.2 41.529,85.598 cw(c41.529,83.82) 43.307,83.82 C131.1
  Top Layer w2: L29.2 35.179,88.392 K14.12
NetC135_1: C135.1 C137.1 C139.1 K12.12 L30.2 | length 22.9
  Top Layer w1: C137.1@75.849,87.025 C139.1 ; C139.1@76.357,89.408 78.318,89.408 cw(c78.318,89.367) 78.359,89.367 ; L30.2 83.058,86.827 cw(c83.058,84.287) 85.598,84.287 C135.1
  Top Layer w2: K12.12 78.359,89.367 ccw(c80.899,89.367) L30.2@80.899,86.827
NetC136_1: C136.1 C140.1 K13.12 L31.2 | length 21.9
  Top Layer w1: C140.1 53.049,89.154 ccw(c53.049,89.378) 53.273,89.378 53.303,89.408 55.331,89.408 cw(c55.331,89.367) 55.372,89.367 ; L31.2 59.436,86.827 cw(c59.436,84.287) 61.976,84.287 C136.1
  Top Layer w2: K13.12 55.372,89.367 ccw(c57.912,89.367) 57.912,86.827 L31.2
NetK1_6: K1.6 K3.6 K5.6 K7.6 K9.6 K10.6 K11.6 XW1.1 | length 196.3
  Top Layer w2: XW1.1 25.146,33.655 ccw(c29.591,33.655) 29.591,29.21 39.116,29.21 ; K11.6 36.576,23.749 ccw(c36.576,26.289) 39.116,26.289 39.116,29.21 ; K10.6 56.769,23.749 ccw(c56.769,26.289) 59.309,26.289 59.309,29.21 ; K9.6 79.756,23.749 ccw(c79.756,26.289) 82.296,26.289 82.296,29.21 ; K7.6 100.552,23.749 ccw(c100.552,26.289) 103.092,26.289 103.092,29.21 ; K5.6 121.349,23.749 ccw(c121.349,26.289) 123.888,26.289 123.888,29.21 ; K3.6 143.184,23.749 144.653,25.218 144.653,29.21 ; K1.6 157.631,23.749 cw(c157.631,25.551) 155.829,25.551 155.829,26.67 ccw(c153.289,26.67) 153.289,29.21 144.653,29.21 ; 39.116,29.21 59.309,29.21 ; 59.309,29.21 82.296,29.21 ; 82.296,29.21 103.092,29.21 ; 103.092,29.21 123.888,29.21 ; 123.888,29.21 144.653,29.21
NetK2_6: K2.6 K4.6 K6.6 K8.6 K12.6 K13.6 K14.6 XW2.1 | length 206.1
  Top Layer w2: XW2.1 25.146,96.393 cw(c28.702,96.393) 28.702,99.949 38.862,99.949 ; K14.6 41.402,105.791 ccw(c41.402,103.251) 38.862,103.251 38.862,99.949 ; K13.6 61.595,105.791 ccw(c61.595,103.251) 59.055,103.251 59.055,99.949 ; K12.6 84.582,105.791 ccw(c84.582,103.251) 82.042,103.251 82.042,99.949 ; K8.6 105.378,105.791 ccw(c105.378,103.251) 102.838,103.251 102.838,99.949 ; K6.6 126.174,105.791 ccw(c126.174,103.251) 123.634,103.251 123.634,99.949 ; K4.6 146.971,105.791 ccw(c146.971,103.251) 144.431,103.251 144.431,99.949 ; K2.6 168.021,105.791 ccw(c168.021,103.251) 165.481,103.251 165.481,101.473 cw(c163.957,101.473) 163.957,99.949 144.431,99.949 ; 38.862,99.949 59.055,99.949 ; 59.055,99.949 82.042,99.949 ; 82.042,99.949 102.838,99.949 ; 102.838,99.949 123.634,99.949 ; 123.634,99.949 144.431,99.949
NetL1_1: L1.1 XP1.1 XP1.3 | length 10.6
  Top Layer w1: L1.1 181.991,70.231 183.102,71.342 XP1.3
RELAY0: C9.2 K11.5 K14.5 XP1.2 | length 259.4
  Top Layer w0.3: v1(46.228,33.528) 46.902,32.854 173.765,32.854 178.982,38.071 178.982,71.921 XP1.2
  Bottom Layer w0.3: C9.2 K11.5 39.374,26.289 46.17,33.085 46.17,99.88 K14.5
RELAY1: C10.2 K10.5 K13.5 XP1.4 | length 240.5
  Top Layer w0.3: v1(68.072,34.798) 69.516,33.354 173.308,33.354 178.482,38.528 178.482,73.421 XP1.4
  Bottom Layer w0.3: C10.2@53.371,26.289 K10.5 59.567,26.289 68.072,34.794 68.072,98.171 K13.5
RELAY2: C11.2 K9.5 K12.5 XP1.6 | length 218.6
  Top Layer w0.3: v1(90.297,34.163) 90.414,34.163 90.723,33.854 172.919,33.854 177.949,38.884 177.949,74.888 XP1.6
  Bottom Layer w0.3: C11.2@76.358,26.289 K9.5 82.554,26.289 v1@90.297,34.032 ; K12.5 90.297,98.933 v1@90.297,34.032 ; v1(90.297,34.163) v1@90.297,34.032
RELAY3: C12.2 K7.5 K8.5 XP1.8 | length 168.3
  Top Layer w0.3: v1(130.937,94.869) 131.822,95.754 149.495,95.754 150.599,94.649 152.216,94.649 152.906,95.34 164.375,95.34 168.402,91.313 173.609,91.313 177.231,87.691 177.231,83.912 XP1.8
  Bottom Layer w0.3: C12.2@97.154,26.289 K7.5 103.124,26.289 110.871,34.036 110.871,96.139 ; K8.5 110.871,99.155 110.871,96.139 ; v1(130.937,94.869) 122.936,94.869 121.666,96.139 110.871,96.139
RELAY4: C13.2 K5.5 K6.5 XP1.10 | length 145.4
  Top Layer w0.3: v1(151.13,95.399) 151.253,95.399 151.556,95.702 152.165,95.702 152.177,95.714 152.574,95.714 152.699,95.84 164.583,95.84 164.708,95.714 169.97,95.714 178.308,87.376 178.308,84.835 XP1.10
  Bottom Layer w0.3: C13.2@117.951,26.289 K5.5 124.147,26.289 132.588,34.73 132.588,96.012 ; K6.5 132.588,98.234 132.588,96.012 ; v1(151.13,95.399) 150.473,94.742 144.145,94.742 142.875,96.012 132.588,96.012
RELAY5: C14.2 K3.5 K4.5 XP1.12 | length 123.9
  Top Layer w0.3: v1(171.958,95.842) 171.958,94.57 179.324,87.204 179.324,85.819 XP1.12
  Bottom Layer w0.3: C14.2@138.747,26.289 K3.5 144.943,26.289 152.527,33.873 152.527,96.012 ; K4.5 152.527,99.092 152.527,96.012 ; v1(171.958,95.842) 170.985,94.869 164.846,94.869 163.703,96.012 152.527,96.012
RELAY6: C15.2 K1.5 K2.5 XP1.14 | length 99.5
  Top Layer w0.3: v1(173.355,94.234) 173.355,94.099 181.102,86.352 XP1.14
  Bottom Layer w0.3: C15.2@159.543,26.289 K1.5 165.739,26.289 173.355,33.905 173.355,86.106 ; K2.5 173.355,99.06 v1(173.355,94.234) 173.355,86.106 ; 173.42,86.041 173.355,86.106
VDD_12V: C1.2 C2.2 C3.2 C4.2 C5.2 C6.2 C7.2 C8.2 C158.2 C159.2 C160.2 C161.2 C162.2 C163.2 C164.2 K1.8 K2.8 K3.8 K4.8 K5.8 K6.8 K7.8 K8.8 K9.8 K10.8 K11.8 K12.8 K13.8 K14.8 L1.2 | length 486.8
  Top Layer w1: v1(39.116,96.012) 39.624,96.52 58.801,96.52 v1(59.309,96.012) 59.944,96.647 81.661,96.647 v1(82.296,96.012) 82.677,96.393 102.711,96.393 v1(103.092,96.012) 103.727,96.647 123.253,96.647 v1(123.888,96.012) 124.48,96.604 152.261,96.604 152.347,96.69 165.356,96.69 v1(165.481,96.564) 169.97,96.564 170.688,97.282 172.974,97.282 v1(177.737,92.519) ; v1(48.484,32.004) v1(68.677,32.004) v1(91.664,32.004) v1(112.46,32.004) v1(133.257,32.004) v1(154.053,32.004) v1(173.99,32.004) 174.117,32.004 180.071,37.958 180.071,57.186 180.657,57.772 180.967,57.772 180.992,57.797 180.992,60.596 181.015,60.619 181.015,61.908 181.241,61.908 181.491,62.158 L1.2 ; v1(179.832,62.23) 179.904,62.158 L1.2@181.015,62.158
  Bottom Layer w0.3: C158.2 33.729,103.352 35.078,103.352 K14.8 ; K11.8 44.275,26.289 C2.2 ; C159.2@53.213,104.061 53.922,103.352 K13.8@55.271,103.352 ; K10.8 64.468,26.289 C3.2@65.151,25.606 ; C160.2@76.2,104.061 76.909,103.352 K12.8@78.258,103.352 ; K9.8 87.455,26.289 C4.2@88.138,25.606 ; C161.2@96.996,104.061 97.705,103.352 K8.8@99.054,103.352 ; K7.8 108.251,26.289 C5.2@108.934,25.606 ; C162.2@117.792,104.061 118.502,103.352 K6.8@119.851,103.352 ; K5.8 129.048,26.289 C6.2@129.731,25.606 ; C163.2@138.589,104.061 139.298,103.352 K4.8@140.647,103.352 ; K3.8 149.844,26.289 C7.2@150.527,25.606 ; C164.2@159.385,104.061 160.094,103.352 K2.8@161.443,103.352 ; K1.8 170.64,26.289 C1.2@171.323,25.606
  Bottom Layer w1: K14.8 35.179,99.949 v1(39.116,96.012) ; K11.8 v1(48.484,32.004) ; K13.8 55.372,99.949 v1(59.309,96.012) ; K10.8 v1(68.677,32.004) ; K12.8 78.359,99.949 v1(82.296,96.012) ; K9.8 v1(91.664,32.004) ; K8.8 99.155,99.949 v1(103.092,96.012) ; K7.8 v1(112.46,32.004) ; K6.8 119.951,99.949 v1(123.888,96.012) ; K5.8 v1(133.257,32.004) ; K4.8 140.748,99.949 144.093,96.604 v1(144.685,96.604) ; K3.8 v1(154.053,32.004) ; K2.8 161.544,99.949 164.929,96.564 v1(165.481,96.564) ; K1.8 173.99,31.145 v1(173.99,32.004) ; v1(177.737,92.519) 177.737,64.325 v1(179.832,62.23)
pads on no net: K1.1 K2.1 K3.1 K4.1 K5.1 K6.1 K7.1 K8.1 K9.1 K10.1 K11.1 K12.1 K13.1 K14.1

## Polygon pours and split planes (outlines as drawn)
GND on Bottom Layer "GND_L02_P000" (solid, remove dead copper, pour order 0): 19.939,19.939 20.066,20.066 188.087,20.066 188.087,109.855 187.96,109.982 19.939,109.982
GND on Top Layer "GND_L01_P001" (solid, remove dead copper, pour order 1): 19.939,19.939 20.066,20.066 188.087,20.066 188.087,109.855 187.96,109.982 19.939,109.982

## Other copper
Top Layer:
  pour cut-out: 43.21,83.536 ccw(c43.307,83.536) 43.307,83.439 44.704,83.439 cw(c44.704,83.386) 44.757,83.386 44.757,79.059 cw(c44.692,79.059) 44.692,78.994 43.21,78.994 43.21,42.713 41.94,42.713 41.94,36.998 37.592,36.998 37.592,43.18 30.48,43.18 30.48,89.068 37.678,89.068
  pour cut-out: 65.037,43.434 67.056,43.434 67.056,82.981 59.74,90.297 50.419,90.297 50.419,38.227 65.037,38.227
  pour cut-out: 88.422,43.434 90.17,43.434 90.17,83.253 83.126,90.297 74.041,90.297 74.041,38.227 88.422,38.227
  pour cut-out: 109.107,43.942 110.377,43.942 110.377,83.73 103.811,90.297 95.264,90.297 95.264,38.227 109.107,38.227
  pour cut-out: 129.809,42.037 131.572,42.037 131.572,83.237 124.385,90.424 115.189,90.424 115.189,38.227 129.809,38.227
  pour cut-out: 150.114,43.053 151.773,43.053 151.773,83.73 145.206,90.297 136.271,90.297 136.271,38.227 150.114,38.227
  pour cut-out: 171.196,42.926 172.974,42.926 172.974,83.222 165.899,90.297 157.353,90.297 157.353,38.227 171.196,38.227

## Silkscreen, mask and mechanical layers (free items; w line width, h text height)
Top Overlay:
  text "IN" at 24.003,86.487 h1.52
  text "OUT" at 23.368,42.545 h1.52